# Altium PCB MagnetismCodeDish.PcbDoc
Units mm, origin at the board's own origin, x right, y up, seen from the top; angles counter-clockwise.
Board outline 26 x 24 mm, 2 copper layers (Top Layer, Bottom Layer); 8 components, 7 nets, 33 pads, 27 vias.
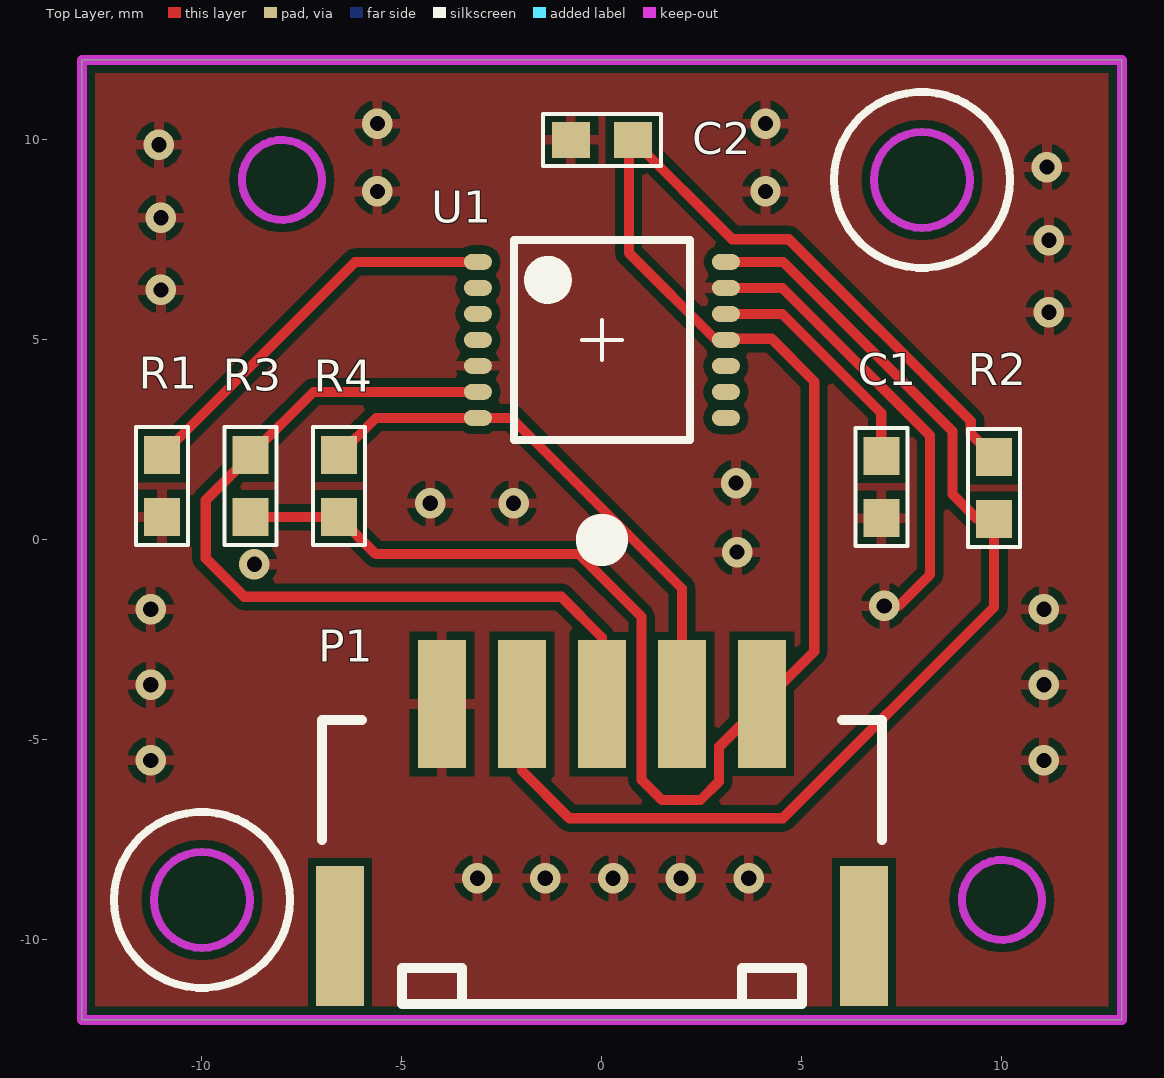
[diagram p0: Top Layer view]
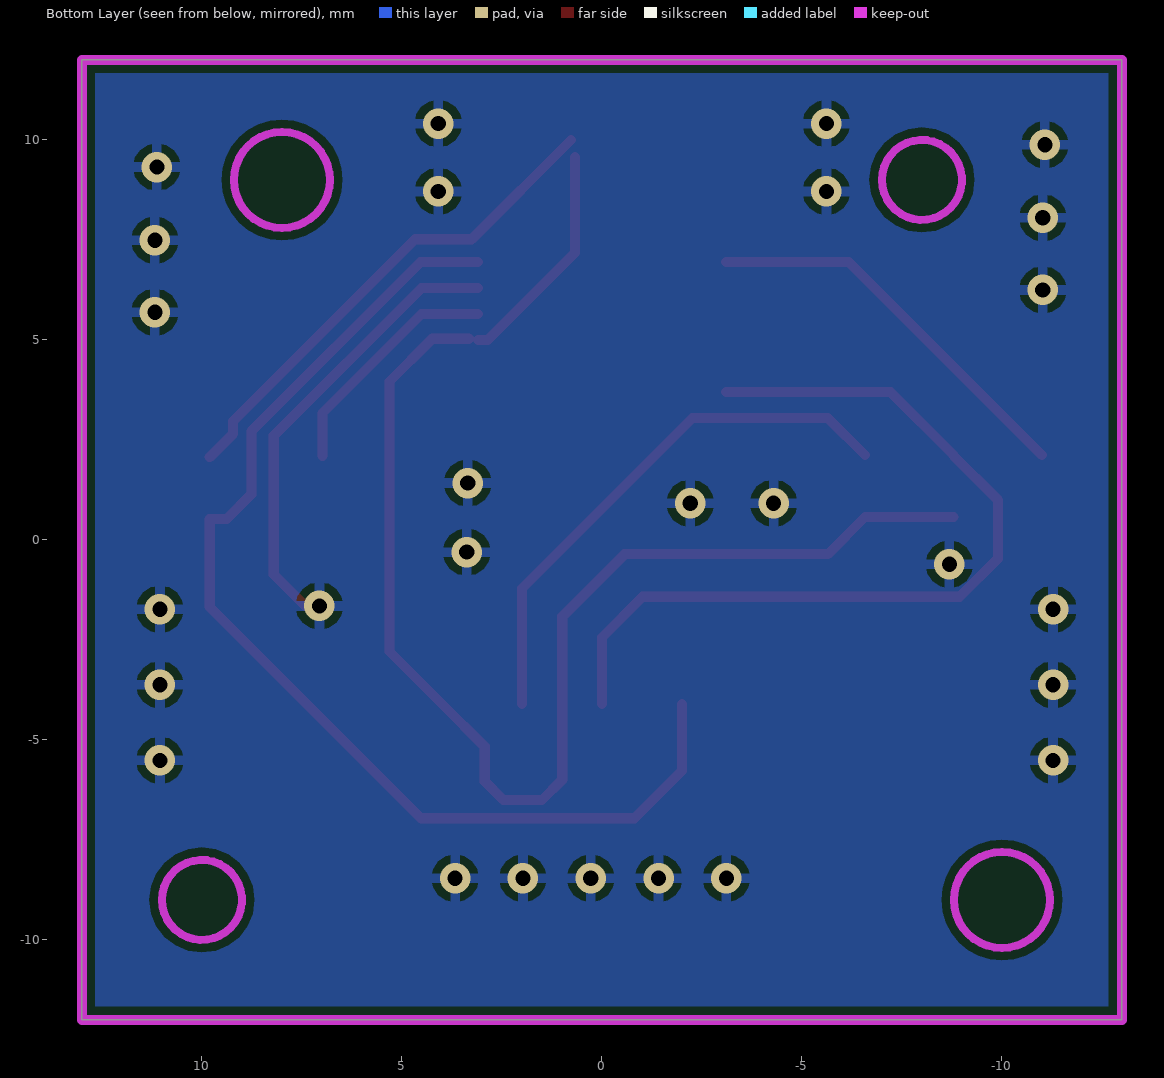
[diagram p1: Bottom Layer view, seen from below]

## Layer stack, top to bottom
Top Layer: signal copper 0.0356
Dielectric: dielectric 0.32, FR-4, Dk 4.8
Bottom Layer: signal copper 0.0356

## Board outline
-13,-12 -13,12 13,12 13,-12

## Design rules (kind name [scope] priority, off if disabled: settings)
Clearance [All] p1: gap=0.203
MinimumSolderMaskSliver [All] p1: minsoldermaskwidth=0.025
PolygonConnect [All] p1: connectstyle=Relief reliefconductorwidth=0.254 reliefentries=4 polygonreliefangle="90 Angle"
RoutingVias [All] p1: holewidth=0.711 width=1.27 viastyle="Through Hole" minholewidth=0.711 minwidth=1.27 maxholewidth=0.711 maxwidth=1.27
SilkscreenOverComponentPads [All] p1: minsilkscreentomaskgap=0.127
SolderMaskExpansion [All] p1: expansion=0.102
Width [All] p1: maxlimit=0.254 minlimit=0.254 preferedwidth=0.254
26 further rules are at their usual default settings.

## Components (designator, comment, footprint, x,y, rotation, side; value= is the part's Value field where it differs from the comment)
C1 "0.1uF" C0603_M1608 6.985,1.321 r270 top
C2 "0.1uF" C0603_M1608 0,10 r0 top
P1 "Header 5" PH-AWB-5P 0,-7 r180 top
R1 "5.1K" C0603_M1608 -10.998,1.346 r270 top
R2 "10K" C0603_M1608 9.804,1.295 r90 top
R3 "10K" C0603_M1608 -8.788,1.346 r270 top
R4 "10K" C0603_M1608 -6.579,1.346 r270 top
U1 "MT6801" SSOP14_C 0,5 r0 top

## Footprints (in the part's own frame and the unit in brackets; to place one, negate y for a bottom-side part, rotate by r counter-clockwise, add the part's x,y. Pads: shape width x height; smd on the part's side, far side on the other; paste and mask are expansions set on the pad)
C0603_M1608 [mm] "Chip Capacitor, 2-Leads, Bod"
  rect 0.95x0.9 smd: 1(-0.775,0) 2(0.775,0)
  silkscreen extent -1.48,-0.65 1.48,0.65
PH-AWB-5P [mm]
  rect 1.2x3.5 smd: 0(-6.55,2.9) 0(6.55,2.9)
  rect 1.2x3.2 smd: 1(4,-2.9) 2(2,-2.9) 3(0,-2.9) 4(-2,-2.9) 5(-4,-2.9)
  silkscreen extent -7,-2.5 7,4.6
SSOP14_C [mm]
  oval 0.7x0.4 smd: 1(-3.1,1.95) 2(-3.1,1.3) 3(-3.1,0.65) 4(-3.1,0) 5(-3.1,-0.65) 6(-3.1,-1.3) 7(-3.1,-1.95) 8(3.1,-1.95) 9(3.1,-1.3) 10(3.1,-0.65) 11(3.1,0) 12(3.1,0.65) 13(3.1,1.3) 14(3.1,1.95)
  silkscreen extent -2.2,-2.5 2.2,2.5, body extent -2.07,-2.4 2.1,2.37, height 2

## Part data
C1 C2: library part Cap, "电容"
P1: "Header, 5-Pin"
R1 R2 R3 R4: library part Res, "电阻"

## Via types
v1: diameter 0.762, hole 0.381, Top Layer to Bottom Layer, tented both sides, 27 vias

## Nets (pads, with @x,y where several pads share a name; then routed paths per layer and width w, separated by ;. In a path a pad name is that pad's centre, name@x,y a point inside that pad or via, vN(x,y) a via of type N, cw(c..) or ccw(c..) an arc to the next point about the centre after c; other vN are vias at no path point)
ENC_A: P1.4 R4.1 U1.7 | length 13.6
  Top Layer w0.254: R4.1 -5.65,3.05 U1.7 -2.263,3.05 2,-1.213 P1.4
ENC_B: P1.3 R3.1 U1.6 | length 21.8
  Top Layer w0.254: U1.6 -7.21,3.7 R3.1 -8.788,2.108 -9.906,0.991 -9.906,-0.457 -8.941,-1.422 -1.016,-1.422 0,-2.438 P1.3
GND: C1.2 C2.1 P1.1 R1.2 U1.5 U1.13 | length 11.6
  Top Layer w0.254: U1.13 4.507,6.3 8.204,2.602 8.204,-0.864 7.417,-1.651 v1(7.061,-1.651)
  other v1: -3.111,-8.458 -1.416,-8.458 0.279,-8.458 1.975,-8.458 3.67,-8.458 -11.278,-5.512 11.049,-5.512 -11.278,-3.624 11.049,-3.624 -11.278,-1.736 11.049,-1.736 -8.687,-0.61 3.378,-0.305 -4.293,0.914 -2.21,0.914 3.353,1.422 11.176,5.69 -11.024,6.248 11.176,7.493 -11.024,8.052 -5.613,8.712 4.089,8.712 11.125,9.322 -11.074,9.881 -5.613,10.408 4.089,10.408
NC_I: P1.2 R2.1 U1.14 | length 28.6
  Top Layer w0.254: P1.2 -2,-5.772 -0.813,-6.96 4.521,-6.96 9.804,-1.676 R2.1 9.386,0.52 8.763,1.143 8.763,2.718 4.531,6.95 U1.14
NetC1_1: C1.1 U1.12 | length 6
  Top Layer w0.254: U1.12 4.51,5.65 6.985,3.175 C1.1
NetR1_1: R1.1 U1.1 | length 9.9
  Top Layer w0.254: R1.1 -6.169,6.95 U1.1
VCC-5V: C2.2 P1.5 R2.2 R3.2 R4.2 U1.11 | length 48.9
  Top Layer w0.254: R3.2 R4.2 -5.652,-0.356 -0.573,-0.356 0.991,-1.919 0.991,-5.994 1.499,-6.502 2.464,-6.502 2.93,-6.036 2.93,-5.17 P1.5 5.309,-2.791 5.309,3.962 4.242,5.029 U1.11@3.327,5.029 ; C2.2@0.673,9.576 0.673,7.177 2.85,5 U1.11 ; C2.2 3.257,7.518 4.674,7.518 9.22,2.972 9.22,2.655 R2.2
pads on no net: P1.0 U1.2 U1.3 U1.4 U1.8 U1.9 U1.10

## Polygon pours and split planes (outlines as drawn)
GND on Bottom Layer "Top Layer-No Net" (solid, remove dead copper, pour order 4): -15.9,13.945 -15.469,13.513 -15.469,-13.513 14.986,-13.513 15.926,-14.453 14.783,-13.31 14.783,12.979
GND on Top Layer "Top Layer-No Net" (solid, remove dead copper, pour order 6): -14.605,13.665 -14.605,-14.707 -14.122,-15.189 -12.09,-13.157 14.961,-13.157 14.961,12.243 14.046,13.157

## Keep-outs
Keep-Out Layer:
  circle w0.2: c8,9 r1.2
  circle w0.2: c-8,9 r1
  circle w0.2: c-10,-9 r1.2
  circle w0.2: c10,-9 r1
  lines w0.254: -13,-12 13,-12 13,12 -13,12 -13,-12

## Other copper
Top Layer:
  text "板厚1.6mm" at -2.794,-18.263 h1.52

## Silkscreen, mask and mechanical layers (free items; w line width, h text height)
Top Overlay:
  circle w1.254: c0,0 r0.025
  circle w0.2: c-10,-9 r2.2
  circle w0.2: c8,9 r2.2